# EAGLE board Platine (EAGLE 6.6.0)

Size 100 x 80 mm. Coordinates in mm from the lower left corner, seen from the top.
Outline: 0,0 100,0 100,80 0,80 0,0
Copper layers (1*16): Top 0.035mm / dielectric 1.5mm / Bottom 0.035mm
Design rules "default": minimum track width 10mil, minimum drill 24mil, track to track 8mil, track to pad 8mil, pad to pad 8mil, via to via 8mil, smd to smd 8mil, copper to edge 40mil, drill to drill 8mil, minimum pad ring 10mil, minimum via ring 8mil, stop-mask expansion 4mil, vias tented up to drill 0mil, thermal gap 10mil

## Footprints (pad centres in the part's own frame; a part is rotated, then mirrored left to right if it is on the bottom)
MA8X2 = drill 0.9 pad 1.422 offset: 1 -8.89,-1.27; 2 -8.89,1.27; 3 -6.35,-1.27; 4 -6.35,1.27; 5 -3.81,-1.27; 6 -3.81,1.27; 7 -1.27,-1.27; 8 -1.27,1.27; 9 1.27,-1.27; 10 1.27,1.27; 11 3.81,-1.27; 12 3.81,1.27; 13 6.35,-1.27; 14 6.35,1.27; 15 8.89,-1.27; 16 8.89,1.27
DIL20 = drill 0.8 pad 1.422 long: 1 -11.43,-3.81; 2 -8.89,-3.81; 3 -6.35,-3.81; 4 -3.81,-3.81; 5 -1.27,-3.81; 6 1.27,-3.81; 7 3.81,-3.81; 8 6.35,-3.81; 9 8.89,-3.81; 10 11.43,-3.81; 11 11.43,3.81; 12 8.89,3.81; 13 6.35,3.81; 14 3.81,3.81; 15 1.27,3.81; 16 -1.27,3.81; 17 -3.81,3.81; 18 -6.35,3.81; 19 -8.89,3.81; 20 -11.43,3.81
DIL40 = drill 0.8 pad 1.422 long: 1 -24.13,-7.62; 2 -21.59,-7.62; 3 -19.05,-7.62; 4 -16.51,-7.62; 5 -13.97,-7.62; 6 -11.43,-7.62; 7 -8.89,-7.62; 8 -6.35,-7.62; 9 -3.81,-7.62; 10 -1.27,-7.62; 11 1.27,-7.62; 12 3.81,-7.62; 13 6.35,-7.62; 14 8.89,-7.62; 15 11.43,-7.62; 16 13.97,-7.62; 17 16.51,-7.62; 18 19.05,-7.62; 19 21.59,-7.62; 20 24.13,-7.62; 21 24.13,7.62; 22 21.59,7.62; 23 19.05,7.62; 24 16.51,7.62; 25 13.97,7.62; 26 11.43,7.62; 27 8.89,7.62; 28 6.35,7.62; 29 3.81,7.62; 30 1.27,7.62; 31 -1.27,7.62; 32 -3.81,7.62; 33 -6.35,7.62; 34 -8.89,7.62; 35 -11.43,7.62; 36 -13.97,7.62; 37 -16.51,7.62; 38 -19.05,7.62; 39 -21.59,7.62; 40 -24.13,7.62
C-2,5 = drill 0.8 pad 1.422 long: 1 -1.27,0; 2 1.27,0
ELKO-2,5 = drill 0.8 pad 1.422 long: + -1.27,0; - 1.27,0
LED3-2,5 = drill 0.8 pad 1.422 long: A -1.27,0; C 1.27,0
DO41-10 = drill 0.9 pad 2.184 octagon: A 5.08,0; C -5.08,0
TO220V = drill 0.9 pad 2.54 octagon: 1 -2.54,0; 2 0,-2.54; 3 2.54,0
MA10X2 = drill 0.9 pad 1.422 offset: 1 -11.43,-1.27; 2 -11.43,1.27; 3 -8.89,-1.27; 4 -8.89,1.27; 5 -6.35,-1.27; 6 -6.35,1.27; 7 -3.81,-1.27; 8 -3.81,1.27; 9 -1.27,-1.27; 10 -1.27,1.27; 11 1.27,-1.27; 12 1.27,1.27; 13 3.81,-1.27; 14 3.81,1.27; 15 6.35,-1.27; 16 6.35,1.27; 17 8.89,-1.27; 18 8.89,1.27; 19 11.43,-1.27; 20 11.43,1.27
MPAD-3,0 = drill 3.2 pad 5.842: B3,0 0,0
HEBW21 = drill 2.5 pad 5.08: 1 6.2,0; 2 3.1,-5.2; 3 0,0
HC49U = drill 0.8 pad 1.93: 1 -2.413,0; 2 2.413,0
R-10 = drill 0.8 pad 1.778 octagon: 1 -5.08,0; 2 5.08,0
DIL28 = drill 0.8 pad 1.422 long: 1 -16.51,-7.62; 2 -13.97,-7.62; 3 -11.43,-7.62; 4 -8.89,-7.62; 5 -6.35,-7.62; 6 -3.81,-7.62; 7 -1.27,-7.62; 8 1.27,-7.62; 9 3.81,-7.62; 10 6.35,-7.62; 11 8.89,-7.62; 12 11.43,-7.62; 13 13.97,-7.62; 14 16.51,-7.62; 15 16.51,7.62; 16 13.97,7.62; 17 11.43,7.62; 18 8.89,7.62; 19 6.35,7.62; 20 3.81,7.62; 21 1.27,7.62; 22 -1.27,7.62; 23 -3.81,7.62; 24 -6.35,7.62; 25 -8.89,7.62; 26 -11.43,7.62; 27 -13.97,7.62; 28 -16.51,7.62
T3301 = drill 0.8 pad 2.184 octagon: 1 -3.251,2.261; 2 3.251,2.261; 3 -3.251,-2.261; 4 3.251,-2.261
MA3X2 = drill 0.9 pad 1.422 offset: 1 -2.54,-1.27; 2 -2.54,1.27; 3 0,-1.27; 4 0,1.27; 5 2.54,-1.27; 6 2.54,1.27
J1X3 = drill 0.9 pad 1.422 offset: 1 -2.54,0; 3 2.54,0 | drill 0.9 pad 1.422 long: 2 0,0

## Placement (x,y rotation side)
AD  [MA8X2]  6.35,19.05 270 top
ADRDEC  [DIL20]  48.26,16.51 90 top
AT89S52  [DIL40]  24.13,33.02 90 top
C1  100n  [C-2,5]  -66.04,78.74 0 top  (outside the outline)
C2  100n  [C-2,5]  -72.39,78.74 0 top  (outside the outline)
C3  10u  [ELKO-2,5]  -49.53,69.85 0 top  (outside the outline)
C4  100n  [C-2,5]  -78.74,78.74 0 top  (outside the outline)
C5  10u  [ELKO-2,5]  -55.88,69.85 0 top  (outside the outline)
C6  33p  [C-2,5]  46.99,64.77 0 top
C7  33p  [C-2,5]  46.99,59.69 0 top
C8  100n  [C-2,5]  24.13,40.64 0 top
C9  100n  [C-2,5]  20.32,74.93 0 top
C10  100n  [C-2,5]  11.43,74.93 0 top
D1  3mm  [LED3-2,5]  -63.5,69.85 0 top  (outside the outline)
D3  1N4007  [DO41-10]  80.01,76.2 0 top
IC3  7805  [TO220V]  86.36,66.04 0 top
KEY  [MA8X2]  6.35,59.69 270 top
LATCH  [DIL20]  48.26,43.18 90 top
LED  [MA10X2]  95.25,41.91 270 top
P1  [MPAD-3,0]  3.81,3.81 0 top
P2  [MPAD-3,0]  3.81,76.2 0 top
P3  [MPAD-3,0]  96.52,3.81 0 top
P4  [MPAD-3,0]  96.52,76.2 0 top
POWER  [HEBW21]  86.36,5.08 90 top
Q2  20MHz  [HC49U]  39.37,62.23 90 top
R1  1k8  [R-10]  -31.75,78.74 0 top  (outside the outline)
R2  100  [R-10]  -44.45,78.74 0 top  (outside the outline)
R3  10k  [R-10]  -57.15,78.74 0 top  (outside the outline)
RAM  [DIL28]  69.85,36.83 270 top
S2  [T3301]  -71.12,68.58 0 top  (outside the outline)
X3  MA2X3  [MA3X2]  6.35,39.37 270 top
X4  [J1X3]  -49.53,85.09 0 top  (outside the outline)

## Library data of the parts
AD ADRDEC AT89S52 C1-C10 D1 D3 IC3 KEY LATCH LED P1-P4 POWER Q2 R1-R3 RAM S2 X3 X4 = 89S52mini

## Nets
1PORT0: AT89S52.39 LATCH.2 LED.20 RAM.11
1PORT1: AT89S52.38 LATCH.3 LED.18 RAM.12
1PORT2: AT89S52.37 LATCH.4 LED.16 RAM.13
1PORT3: AT89S52.36 LATCH.5 LED.14 RAM.15
1PORT4: AT89S52.35 LATCH.6 LED.12 RAM.16
1PORT5: AT89S52.34 LATCH.7 LED.10 RAM.17
1PORT6: AT89S52.33 LATCH.8 LED.8 RAM.18
1PORT7: AT89S52.32 LATCH.9 LED.6 RAM.19
2PORT8: ADRDEC.1 AT89S52.21 RAM.25
2PORT9: ADRDEC.2 AT89S52.22 RAM.24
2PORT10: AT89S52.23 RAM.21
2PORT11: AT89S52.24 RAM.23
2PORT12: AT89S52.25 RAM.2
2PORT13: AT89S52.26
2PORT14: AT89S52.27
2PORT15: AT89S52.28
+5V: AD.14 AD.16 ADRDEC.20 AT89S52.31 AT89S52.40 C2.2 C3.+ C4.2 C5.+ C8.1 C9.2 C10.2 IC3.3 KEY.14 KEY.16 LATCH.20 R1.2 RAM.26 RAM.28 S2.3 X3.2
A0: LATCH.19 LED.13 RAM.10
A1: LATCH.18 LED.11 RAM.9
A2: LATCH.17 LED.9 RAM.8
A3: LATCH.16 LED.7 RAM.7
A4: LATCH.15 LED.5 RAM.6
A5: LATCH.14 LED.3 RAM.5
A6: LATCH.13 LED.1 RAM.4
A7: LATCH.12 RAM.3
GND: AD.2 AD.4 ADRDEC.10 ADRDEC.11 AT89S52.20 C1.1 C2.1 C4.1 C5.- C6.2 C7.2 C8.2 C9.1 C10.1 IC3.2 KEY.2 KEY.4 LATCH.1 LATCH.10 LED.17 LED.19 POWER.2 POWER.3 R3.1 RAM.14 X3.6
N$1: AT89S52.9 X4.2
N$2: R2.1 S2.1
N$3: C3.- R2.2 R3.2 X4.1
N$4: X3.5 X4.3
N$5: D3.A POWER.1
N$6: C1.2 D3.C IC3.1
N$7: AT89S52.19 C6.1 Q2.2
N$8: AT89S52.10 KEY.15
N$9: AT89S52.18 C7.1 Q2.1
N$10: AT89S52.8 X3.3
N$11: AT89S52.7 X3.1
N$12: AT89S52.6 X3.4
N$13: AT89S52.11 D1.C KEY.13
N$14: AT89S52.12 KEY.11
N$15: AT89S52.13 KEY.9
N$16: AT89S52.14 KEY.7
N$17: AT89S52.15 KEY.5
N$18: AD.1 AT89S52.5
N$19: AD.3 AT89S52.4
N$20: AD.5 AT89S52.3
N$21: AD.7 AT89S52.2
N$22: AD.9 AT89S52.1
N$23: D1.A R1.1
N$32: ADRDEC.3 AT89S52.17 RAM.22
N$33: ADRDEC.4 AT89S52.16 RAM.27
N$34: ADRDEC.19 RAM.20
N$35: ADRDEC.18 LED.4
N$36: ADRDEC.17 LED.2
N$41: AT89S52.30 LATCH.11

## Tracks (layer width: path | path; a pad name or v marks a point on that pad's centre or on a via)
1PORT0  (3 unrouted)
1PORT1  (3 unrouted)
1PORT2  (3 unrouted)
1PORT3  (3 unrouted)
1PORT4  (3 unrouted)
1PORT5  (3 unrouted)
1PORT6  (3 unrouted)
1PORT7  (3 unrouted)
2PORT8  (2 unrouted)
2PORT9  (2 unrouted)
2PORT10  (1 unrouted)
2PORT11  (1 unrouted)
2PORT12  (1 unrouted)
+5V  (20 unrouted)
A0  (2 unrouted)
A1  (2 unrouted)
A2  (2 unrouted)
A3  (2 unrouted)
A4  (2 unrouted)
A5  (2 unrouted)
A6  (2 unrouted)
A7  (1 unrouted)
GND  (25 unrouted)
N$1  (1 unrouted)
N$2  (1 unrouted)
N$3  (3 unrouted)
N$4  (1 unrouted)
N$5  (1 unrouted)
N$6  (2 unrouted)
N$7  (2 unrouted)
N$8  (1 unrouted)
N$9  (2 unrouted)
N$10  (1 unrouted)
N$11  (1 unrouted)
N$12  (1 unrouted)
N$13  (2 unrouted)
N$14  (1 unrouted)
N$15  (1 unrouted)
N$16  (1 unrouted)
N$17  (1 unrouted)
N$18  (1 unrouted)
N$19  (1 unrouted)
N$20  (1 unrouted)
N$21  (1 unrouted)
N$22  (1 unrouted)
N$23  (1 unrouted)
N$32  (2 unrouted)
N$33  (2 unrouted)
N$34  (1 unrouted)
N$35  (1 unrouted)
N$36  (1 unrouted)
N$41  (1 unrouted)